# Altium PCB AdaptiveLightingSatellite.PcbDoc
Units mm, origin at the board's own origin, x right, y up, seen from the top; angles counter-clockwise.
Board outline 23.37 x 31.24 mm, 2 copper layers (Top Layer, Bottom Layer); 24 components, 18 nets, 144 pads, 143 vias.
Unrouted connection lines stored in the file: 2.
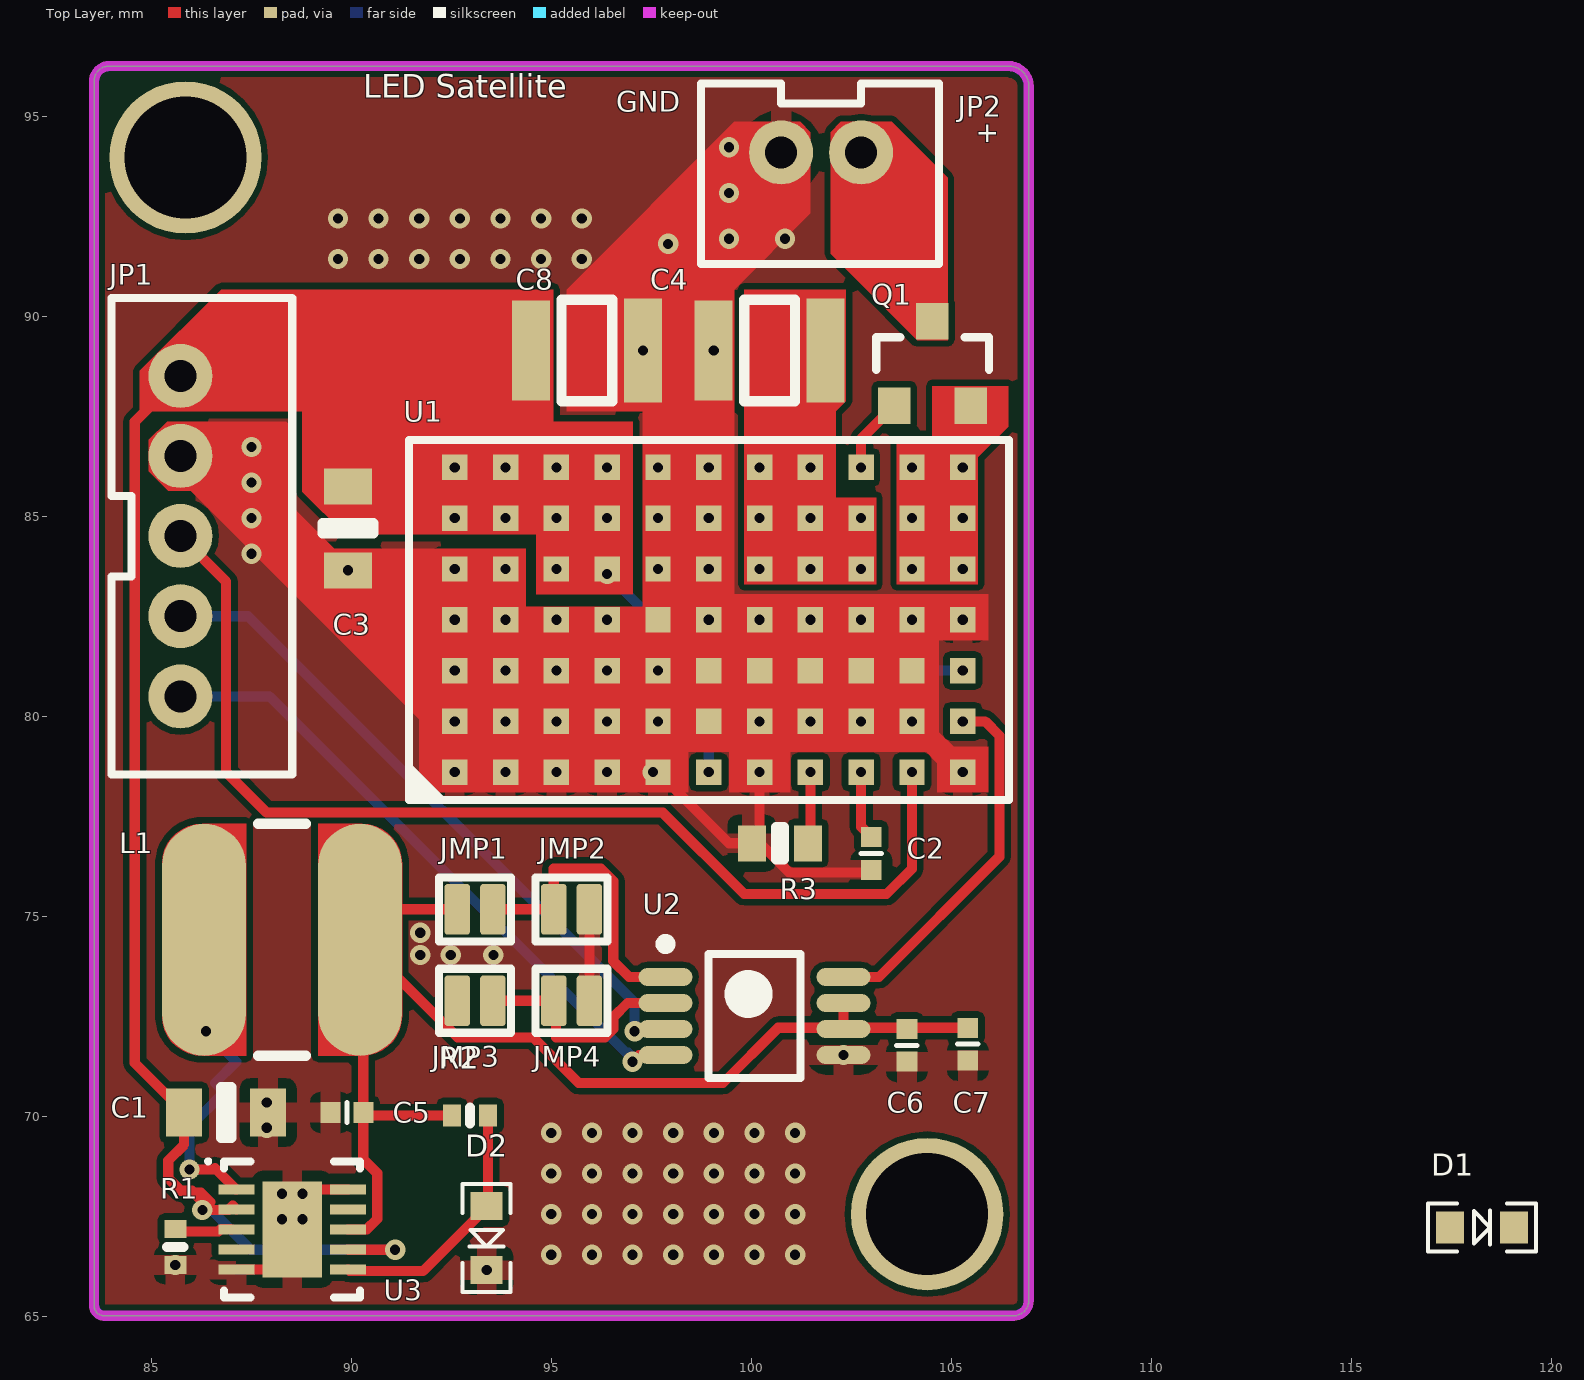
[diagram p0: Top Layer view]
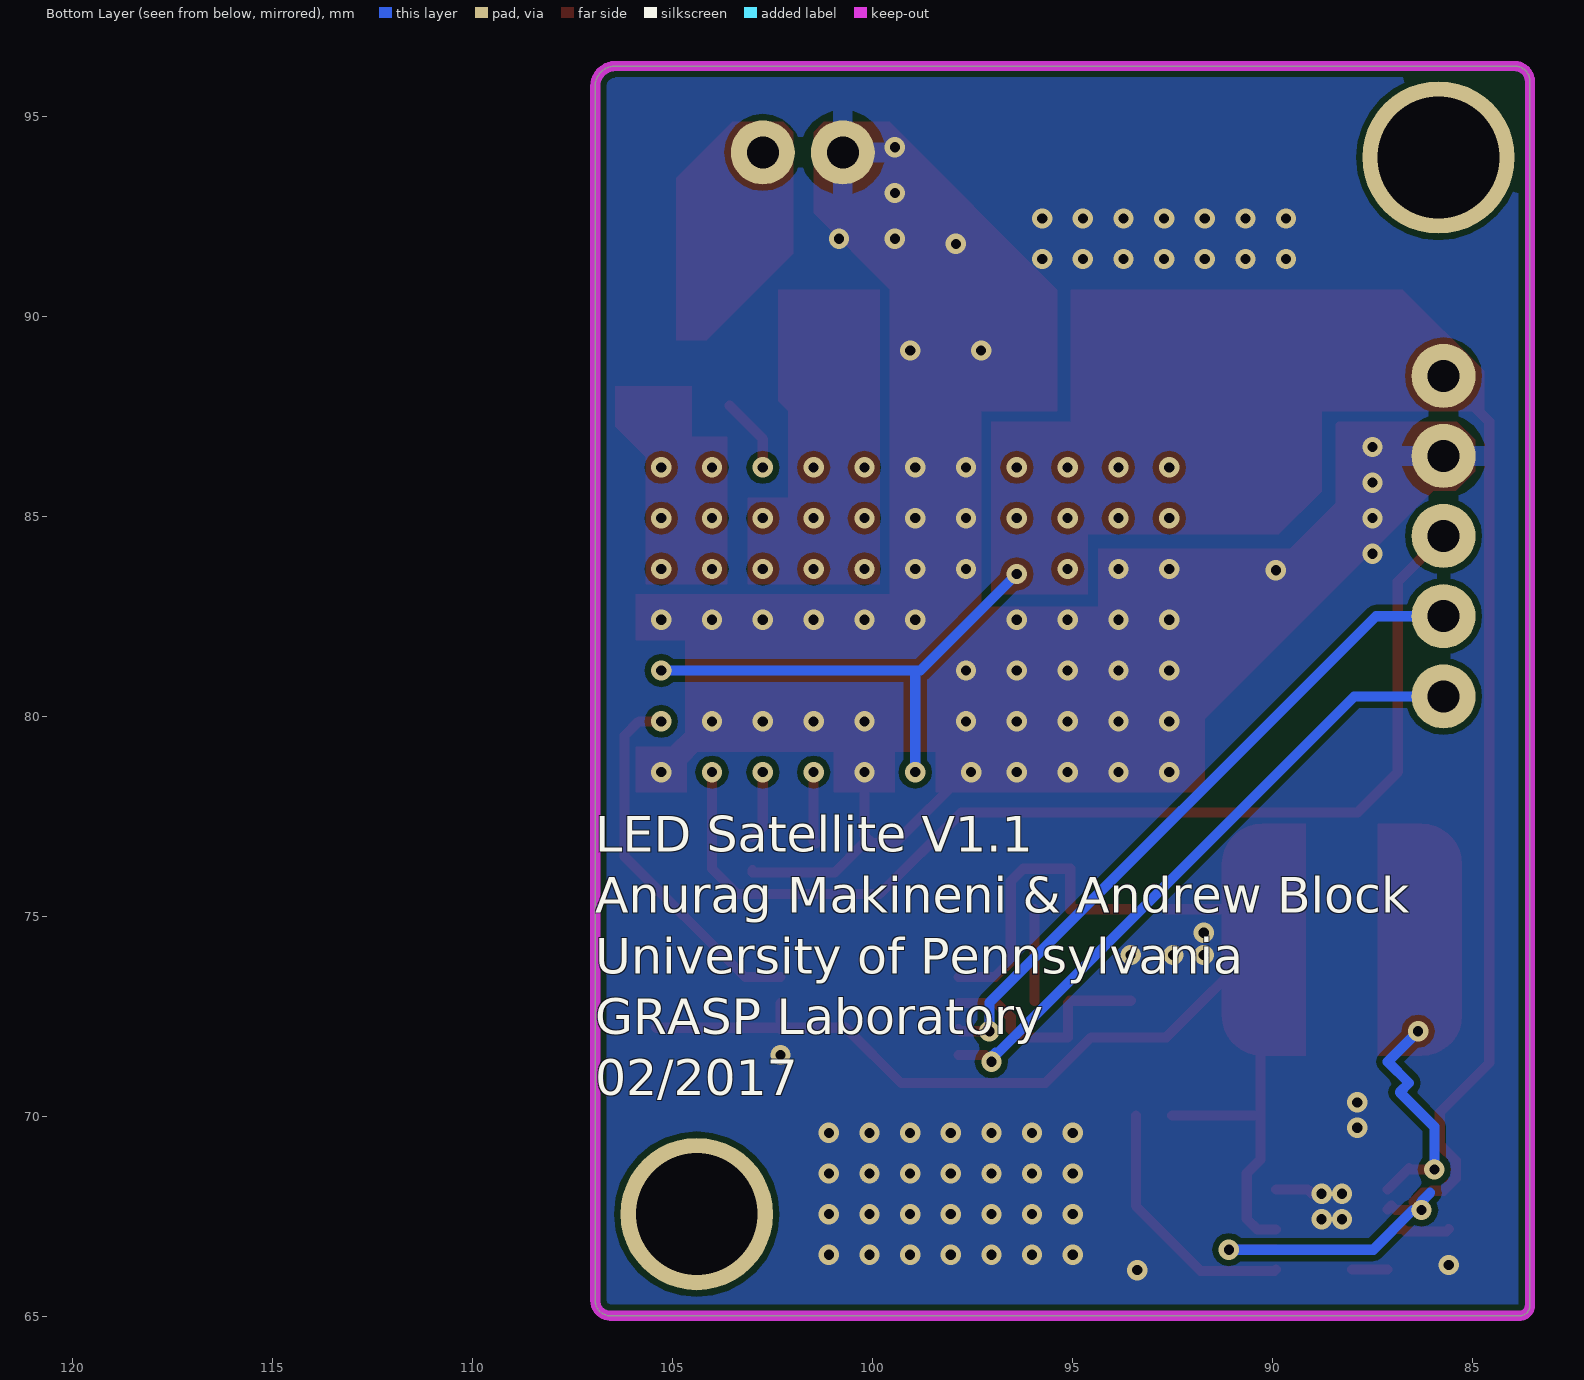
[diagram p1: Bottom Layer view, seen from below]
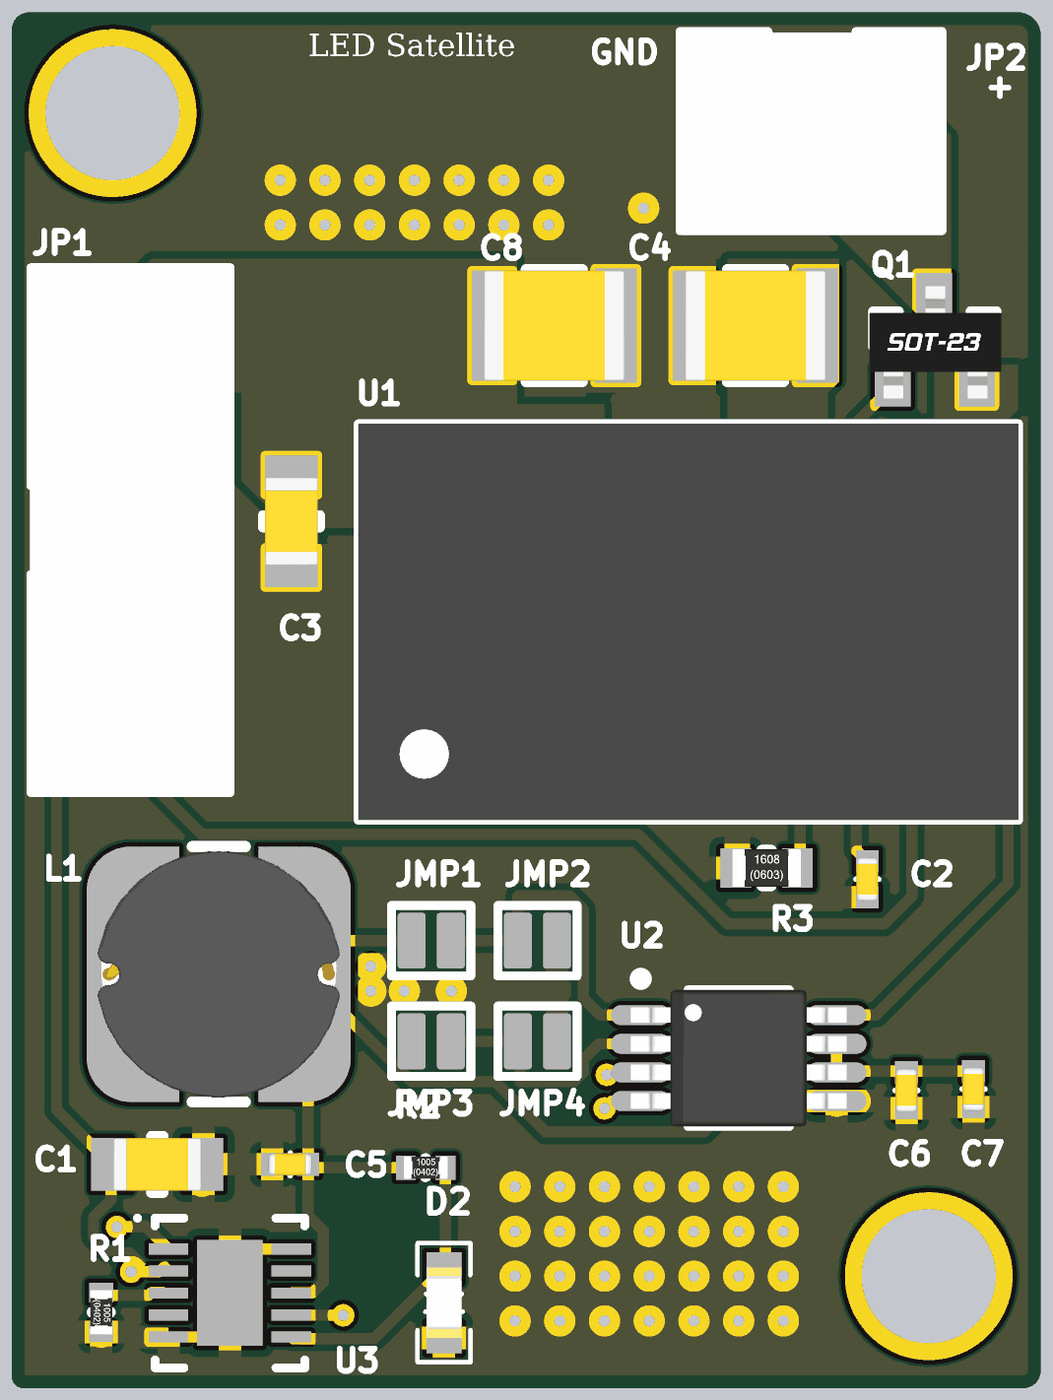
[diagram p2: 3D render of the assembled board from above, using the file's embedded part models]

## Layer stack, top to bottom
Top Solder: solder mask 0.0102, Solder Resist, Dk 3.5
Top Layer: signal copper 0.0356
Dielectric 1: dielectric 0.32, FR-4, Dk 4.8
Bottom Layer: signal copper 0.0356
Bottom Solder: solder mask 0.0102, Solder Resist, Dk 3.5

## Board outline
83.566,65.278 ccw(c83.82,65.278) 83.82,65.024 106.553,65.024 ccw(c106.553,65.405) 106.934,65.405 106.934,95.758 ccw(c106.426,95.758) 106.426,96.266 83.947,96.266 ccw(c83.947,95.885) 83.566,95.885

## Design rules (kind name [scope] priority, off if disabled: settings)
Clearance [All] p1: gap=0.152 ignorepadtopadclearanceinfootprint=FALSE
PolygonConnect PolygonConnect_1 [IsVia] p1: connectstyle=Direct reliefconductorwidth=0.254 reliefentries=4 polygonreliefangle="90 Angle" airgapwidth=0.254
PolygonConnect [All] p2: connectstyle=Relief reliefconductorwidth=0.508 reliefentries=4 polygonreliefangle="90 Angle" airgapwidth=0.254
RoutingVias [All] p1: holewidth=0.254 width=0.508 viastyle="Through Hole" minholewidth=0.254 minwidth=0.508 maxholewidth=0.254 maxwidth=0.508
SolderMaskExpansion SolderMaskExpansion_1 [IsVia] p1: expansion=0.025 soldermaskfromhole=TRUE
SolderMaskExpansion [All] p2: expansion=0.102
Width [All] p1: maxlimit=0.254 minlimit=0.254 preferedwidth=0.254
30 further rules are at their usual default settings.

## Components (designator, comment, footprint, x,y, rotation, side; value= is the part's Value field where it differs from the comment)
C1 "1uF" C0805[2012X120] 86.868,70.104 r180 top
C2 "10nF 100V 0402" C0402[1005X55] 102.997,76.581 r90 top value=10nF
C3 "1uF" C0805[2012X120] 89.916,84.709 r90 top
C4 "10uF 50V X5R +/-20% 1210" C1210[3225X150] 100.457,89.154 r180 top value="10 uF"
C5 "10uF 6.3V 0402" C0402[1005X55] 89.887,70.104 r0 top value=10uF
C6 "0.1uF 6.3V 0402" C0402[1005X55] 103.886,71.784 r270 top value=0.1uF
C7 "4.7uF 6.3V 0402" C0402[1005X55] 105.41,71.813 r90 top value=4.7uF
C8 "4.7uF 100V 1210" C1210[3225X200] 95.885,89.154 r180 top value=4.7uF
D1 "LED_0603_GREEN_5mA" LED0603 118.262,67.234 r0 top
D2 "LED_0603_BLUE_5mA" LED0603 93.381,66.963 r270 top
JMP1 "Solder Jumper" SOLDER-JUMPER 93.091,75.184 r90 top
JMP2 "Solder Jumper" SOLDER-JUMPER 95.504,75.184 r90 top
JMP3 "" SOLDER-JUMPER 93.091,72.898 r90 top
JMP4 "Solder Jumper" SOLDER-JUMPER 95.504,72.898 r90 top
JP1 "JST_PH_5_VERT" JST-PH-5-PTH-VERT 85.725,84.519 r270 top
JP2 "JST_PH_2_VERT" JST-PH-2-PTH-VERT 101.743,94.107 r180 top
L1 "SDR0604-470KL" SDR0604 88.265,74.422 r0 top value=47uH
Q1 "Si2319DS-T1-E3" SOT23-3 104.521,88.773 r0 top
R1 "56K2 1% 0402" R0402[1005] 85.596,66.744 r270 top value=56K2
R2 "10K 1% 0402" R0402[1005] 92.964,70.028 r0 top value=10K
R3 "30.1K 1% 0603" R0603[1608] 100.711,76.835 r0 top value=30.1K
U1 "LTM8042" LGA-77 98.933,82.423 r90 top
U2 "DAC121C085" TSSOP-8 100.076,72.517 r0 top
U3 "LM5165YDRCR" "VSON-10 (3mmx3mm)" 88.519,67.183 r0 top

## Footprints (in the part's own frame and the unit in brackets; to place one, negate y for a bottom-side part, rotate by r counter-clockwise, add the part's x,y. Pads: shape width x height; smd on the part's side, far side on the other; paste and mask are expansions set on the pad)
C0402[1005X55] [mm] "Chip Capacitor, Body 1.0x0.5mm"
  rect 0.5x0.52 smd: 1(-0.41,0) 2(0.41,0)
  silkscreen extent 0,-0.25 0,0.25, body extent -0.5,-0.25 0.5,0.25, height 0.56
C0805[2012X120] [mm] "Chip Capacitor, Body 2.0x1.25mm"
  rect 0.9x1.2 smd: 1(-1.05,0) 2(1.05,0)
  silkscreen extent -0.13,-0.64 0.13,0.64, body extent -1,-0.6 1,0.6, height 1.21
C1210[3225X150] [mm] "Chip Capacitor, Body 3.2x2.5mm"
  rect 0.95x2.6 smd: 1(-1.4,0)
  rect 0.95x2.5 smd: 2(1.4,0)
  silkscreen extent -0.64,-1.27 0.64,1.27, body extent -1.6,-1.25 1.6,1.25, height 1.51
C1210[3225X200] [mm] "Chip Capacitor, Body 3.2x2.5mm"
  rect 0.95x2.6 smd: 1(-1.4,0)
  rect 0.95x2.5 smd: 2(1.4,0)
  silkscreen extent -0.64,-1.27 0.64,1.27, body extent -1.6,-1.25 1.6,1.25, height 1.99
JST-PH-2-PTH-VERT [mm]
  round 1.6 hole 0.8: 1(-1,0) 2(1,0)
  silkscreen extent -2.95,-1.72 3,2.79, body extent -2.95,-1.7 2.95,2.8, height 6
JST-PH-5-PTH-VERT [mil]
  round 63 hole 31.5: 1(-157.48,0) 2(-78.74,0) 3(0,0) 4(79,0) 5(158,0)
  silkscreen extent -234,-68 235,110, body extent -236,-69 232,108, height 236
LED0603 [mm]
  rect 0.7x0.8 smd: A(-0.8,0) C(0.8,0)
  silkscreen extent -1.35,-0.6 1.35,0.6, body extent -0.8,-0.4 0.8,0.4, height 0.75
LGA-77 [mm] "LGA, 77-Leads, Body 9.00x15.00mmx2.82mm, Pitch 1.27mm"
  rect 0.635x0.635 smd: A1(-3.81,6.35) A2(-2.54,6.35) A3(-1.27,6.35) A4(0,6.35) A5(1.27,6.35) A6(2.54,6.35) A7(3.81,6.35) B1(-3.81,5.08) B2(-2.54,5.08) B3(-1.27,5.08) B4(0,5.08) B5(1.27,5.08) B6(2.54,5.08) B7(3.81,5.08) C1(-3.81,3.81) C2(-2.54,3.81) C3(-1.27,3.81) C4(0,3.81) C5(1.27,3.81) C6(2.54,3.81) C7(3.81,3.81) D1(-3.81,2.54) D2(-2.54,2.54) D3(-1.27,2.54) D4(0,2.54) D5(1.27,2.54) D6(2.54,2.54) D7(3.81,2.54) E1(-3.81,1.27) E2(-2.54,1.27) E3(-1.27,1.27) E4(0,1.27) E5(1.27,1.27) E6(2.54,1.27) E7(3.81,1.27) F1(-3.81,0) F2(-2.54,0) F3(-1.27,0) F4(0,0) F5(1.27,0) F6(2.54,0) F7(3.81,0) G1(-3.81,-1.27) G2(-2.54,-1.27) G3(-1.27,-1.27) G4(0,-1.27) G5(1.27,-1.27) G6(2.54,-1.27) G7(3.81,-1.27) H1(-3.81,-2.54) H2(-2.54,-2.54) H3(-1.27,-2.54) H4(0,-2.54) H5(1.27,-2.54) H6(2.54,-2.54) H7(3.81,-2.54) J1(-3.81,-3.81) J2(-2.54,-3.81) J3(-1.27,-3.81) J4(0,-3.81) J5(1.27,-3.81) J6(2.54,-3.81) J7(3.81,-3.81) K1(-3.81,-5.08) K2(-2.54,-5.08) K3(-1.27,-5.08) K4(0,-5.08) K5(1.27,-5.08) K6(2.54,-5.08) K7(3.81,-5.08) L1(-3.81,-6.35) L2(-2.54,-6.35) L3(-1.27,-6.35) L4(0,-6.35) L5(1.27,-6.35) L6(2.54,-6.35) L7(3.81,-6.35)
  silkscreen extent -4.5,-7.5 4.5,7.5, body extent -4.5,-7.5 4.5,7.5, height 2.82
R0402[1005] [mm] "Chip Resistor, Body 1.0x0.5mm"
  rect 0.45x0.55 smd: 1(-0.45,0) 2(0.45,0)
  silkscreen extent 0,-0.2 0,0.2, body extent -0.5,-0.25 0.5,0.25, height 0.35
R0603[1608] [mm] "Chip Resistor, Body 1.55x0.85mm"
  rect 0.7x0.9 smd: 1(-0.7,0) 2(0.7,0)
  silkscreen extent -0.1,-0.4 0.1,0.4, body extent -0.77,-0.42 0.78,0.43, height 0.45
SDR0604 [mm]
  rrect100% 2.1x5.8 smd: 1(-1.95,0) 2(1.95,0)
  Top Layer region: -2,2.9 -0.9,2.9 -0.9,-2.9 -2,-2.9 -2.5,-2.766 -2.866,-2.4 -3,-1.9 -3,-1.9 -3,1.9 -2.866,2.4 -2.5,2.766 -2,2.9
  Top Layer region: 2,2.9 0.9,2.9 0.9,-2.9 2,-2.9 2.5,-2.766 2.866,-2.4 3,-1.9 3,-1.9 3,1.9 2.866,2.4 2.5,2.766 2,2.9
  silkscreen extent -0.6,-2.9 0.6,2.9, body extent -2.75,-2.8 2.75,2.8, height 4.55
SOLDER-JUMPER [mm]
  rrect25% 1.27x0.635 smd mask+0: 1(0,0.445) 2(0,-0.445)
  silkscreen extent -0.8,-0.9 0.8,0.9
SOT23-3 [mil]
  rect 32x36 smd: 1(-37.4,-39.37) 2(0,44) 3(38,-39.37)
  silkscreen extent -55,-4 56,28, body extent -58,-50 60,50, height 39
TSSOP-8 [mm] "TSOP, 8-Leads, Body 3.00x3.00mm, Pitch 0.65mm, IPC Medium Density"
  oval 1.35x0.45 smd: 1(-2.225,0.975) 2(-2.225,0.325) 3(-2.225,-0.325) 4(-2.225,-0.975) 5(2.225,-0.975) 6(2.225,-0.325) 7(2.225,0.325) 8(2.225,0.975)
  silkscreen extent -2.35,-1.55 1.15,1.92, body extent -2.45,-1.55 2.45,1.55, height 1.1
"VSON-10 (3mmx3mm)" [mm] "VSON, 10-Leads, Body 3.00x3.00mm, Pitch 0.50mm, Thermal Pad 2.40x1.49mm, IPC Medium Density"
  rect 0.9x0.25 smd: 1(-1.395,1) 2(-1.395,0.5) 3(-1.395,0) 4(-1.395,-0.5) 5(-1.395,-1) 6(1.395,-1) 7(1.395,-0.5) 8(1.395,0) 9(1.395,0.5) 10(1.395,1)
  rect 1.49x2.4 smd: 11(0,0)
  silkscreen extent -2.15,-1.7 1.7,1.75, body extent -1.55,-1.55 1.55,1.55, height 1

## Part data
C1 C3: library part CAP_1uF_100V_0805_20%, "CAP_1uF 50V 20% 0805 (2012 metric)", Manufacturer=TDK, Package Description="0805 (2012 Metric)", Package Reference=0805, PartNumber=C2012X5R1H105M085AB, Tolerance=20%, Voltage=50V, Mounting Technology="Surface Mount"
C2: library part CAP_10nF_100V_0402_10%, "10nF 100V 10% 0402 (1005 Metric)", Manufacturer=TDK, PartNumber=C1005X7S2A103K050BB, Tolerance=10%, Voltage=100V, Mounting Technology="Surface Mount", PackageDescription="0402 (1005 Metric)", PackageReference=0402
C4: library part CAP_10uF_50V_1210_20%, Manufacturer="Taiyo Yuden", PartNumber=UMK325BJ106MM-T, Tolerance=20%, Voltage=50V, Mounting Technology="Surface Mount", PackageDescription="1210 (3325 Metric)", PackageReference=1210
C5: library part CAP_10uF_6.3V_0402_20%, "10uF 6.3V 20% 0402 (1005 Metric)", Manufacturer=Murata, PartNumber=GRM155R60J106ME44D, Tolerance=20%, Voltage=6.3V, Mounting Technology="Surface Mount", PackageDescription="0402 (1005 Metric)", PackageReference=0402
C6: library part CAP_0.1uF_6.3V_0402_10%, "0.1uF 6.3V 10% 0402 (1005 Metric)", Manufacturer=Murata, PartNumber=GRM155R70J104KA01D, Tolerance=10%, Voltage=6.3V, Mounting Technology="Surface Mount", PackageDescription="0402 (1005 Metric)", PackageReference=0402
C7: library part CAP_4.7uF_6.3V_0402_20%, "4.7uF 6.3V 20% 0402 (1005 Metric)", Manufacturer=Murata, PartNumber=GRM155R60J475ME47D, Tolerance=20%, Voltage=6.3V, Mounting Technology="Surface Mount", PackageDescription="0402 (1005 Metric)", PackageReference=0402
C8: library part CAP_4.7uF_100V_1210_10%, "4.7uF 100V 10% 1210 (3225 Metric)", Manufacturer=Murata, PartNumber=GRJ32DC72A475KE11L, Tolerance=10%, Voltage=100V, Mounting Technology="Surface Mount", PackageDescription="1210 (3225 Metric)", PackageReference=1210
D1: Manufacturer="Lite-On Inc.", PartNumber=LTST-C193TGKT-5A, Mounting Technology="Surface Mount", PackageDescription="0603 (1608 Metric)", PackageReference=0603
D2: Manufacturer="Lite-On Inc.", PartNumber=LTST-C193TBKT-5A, Mounting Technology="Surface Mount", PackageDescription="0603 (1608 Metric)", PackageReference=0603
JMP1 JMP2 JMP3 JMP4: library part SOLDER_JMPR
JP1: Manufacturer="JST Sales America, Inc.", PartNumber=B5B-PH-K-S(LF)(SN), Mounting Technology="Through Hole", PackageReference=JST-PH
JP2: Manufacturer="JST Sales America, Inc.", PartNumber=B2B-PH-K-S(LF)(SN), Mounting Technology="Through Hole", PackageReference=JST-PH
L1: "47uH 10% 0.72A 0604", Current=0.72A, Manufacturer=Bourns, Mounting Technology="Surface Mount", PackageReference=SDR0604, PartNumber=SDR0604-470KL
Q1: "P-Channel MOSFET", Manufacturer=Vishay, PartNumber="Si2319DS-T1-E3 #PBF", Mounting Technology="Surface Mount", PackageReference=SOT23-3
R1: library part RES_56K2_0402_1%, "56K2 0.063W 1% 0402 (1005 Metric)", Manufacturer="KOA Speer", PartNumber=RK73H1ETTP5622F, Power=0.063W, Tolerance=1%, ComponentLink1Description=Datasheet, ComponentLink1URL=http://www.koaspeer.com/catimages/Products/RK73H/RK73H.pdf, Mounting Technology="Surface Mount", PackageDescription="0402 (1005 Metric)", PackageReference=0402
R2: library part RES_10K_0402_1%, "10K 0.063W 1% 0402 (1005 Metric)", Manufacturer="KOA Speer", PartNumber=RK73H1ETTP1002F, Power=0.063W, Tolerance=1%, ComponentLink1Description=Datasheet, ComponentLink1URL=http://www.koaspeer.com/catimages/Products/RK73H/RK73H.pdf, Mounting Technology="Surface Mount", PackageDescription="0402 (1005 Metric)", PackageReference=0402
R3: library part RES_30.1K_0603_1%, "30.1K 0.06W 1% 0603 (1005 Metric)", Manufacturer="NIC Corporation", PartNumber=NRC06F3012TRF, Power=0.06, Tolerance=1%, ComponentLink1Description=Datasheet, ComponentLink1URL=https://www.arrow.com/en/products/nrc06f3012trf/nic-components, Mounting Technology="Surface Mount", PackageDescription="0603 (1608 Metric)", PackageReference=0603
U1: Manufacturer="Linear Technology", PartNumber=LTM8042EV#PBF, Mounting Technology="Surface Mount", PackageReference=LGA
U2: "12 Bit Digital to Analog Converter", Manufacturer="Texas Instruments", Mounting Technology="Surface Mount", PackageReference=VSSOP-8, PartNumber=DAC121C085
U3: "LM5165 3-V to 65-V Input, 150-mA Synchronous Buck Converter", Manufacturer="Texas Instruments", Mounting Technology="Surface Mount", PackageReference=VSON-10, PartNumber=LM5165YDRCR

## Free pads (board coordinates)
  round 3.81 hole 3.048: 2(104.394,67.564) 3(85.852,93.98)

## Via types
v1: diameter 0.508, hole 0.254, Top Layer to Bottom Layer, 143 vias

## Nets (pads, with @x,y where several pads share a name; then routed paths per layer and width w, separated by ;. In a path a pad name is that pad's centre, name@x,y a point inside that pad or via, vN(x,y) a via of type N, cw(c..) or ccw(c..) an arc to the next point about the centre after c; other vN are vias at no path point)
3V3: C5.2 C6.1 C7.2 JMP1.1 JMP3.1 L1.2 R2.1 U2.6 U2.7 U3.8 | length 30.8
  Top Layer w0.254: U3.8 90.384,67.183 90.643,67.442 90.643,68.587 90.297,68.934 C5.2 ; R2.1 90.373,70.028 C5.2 ; JMP1.1 90.977,75.184 L1.2 L1.2@90.297,74.34 ; U2.6 U2.6@102.301,72.223 ; U2.7 U2.6@102.301,72.223 ; C7.2 U2.6@102.301,72.223 ; C5.2 L1.2@90.297,74.34 ; L1.2@90.297,74.34 92.653,71.984 94.54,71.984 95.683,70.841 99.289,70.841 100.671,72.223 U2.6@102.301,72.223
BATT+: C1.2 C3.2 C8.2 JP1.1 U1.A6 U1.A7 U1.B6 U1.B7 U1.C5 U1.C6 U1.C7 U1.D5 U1.D6 U1.D7 U1.F1 U1.L3 U3.2 U3.7 | length 43.5
  Top Layer w0.254: JP1.1 84.582,87.376 84.582,71.34 C1.2 85.818,69.3 85.42,68.903 85.42,68.461 85.733,68.148 86.009,68.148 86.06,68.097 ; U3.2 87.032,67.775 86.923,67.666 v1(86.274,67.666) ; U3.7 89.922,66.675 v1(91.092,66.675) ; 86.06,68.097 86.239,68.097 86.472,67.864 v1(86.274,67.666) ; 86.06,68.097 86.274,67.884 v1(86.274,67.666)
  Bottom Layer w0.254: 86.06,68.097 86.274,67.884 v1(86.274,67.666) 86.492,67.666 87.482,66.675 v1(91.092,66.675) ; v1(96.393,83.566) 98.806,81.153 v1(105.283,81.153) ; v1(98.933,78.613) 98.933,81.026
  other v1: 95.123,83.693 92.583,84.963 93.853,84.963 95.123,84.963 96.393,84.963 92.583,86.233 93.853,86.233 95.123,86.233 96.393,86.233
CTL: U1.L2 U2.8 | length 9.2
  Top Layer w0.254: U2.8 103.19,73.492 106.197,76.499 106.197,79.527 105.842,79.883 v1(105.283,79.883)
ENABLE: D1.A JP1.3 U1.K1 | length 27.5
  Top Layer w0.254: JP1.3 86.868,83.376 86.868,78.613 87.88,77.601 97.786,77.601 99.822,75.565 103.378,75.565 104.013,76.2 v1(104.013,78.613)
GND: C1.1 C2.1 C3.1 C4.2 C5.1 C6.2 C7.1 C8.1 D1.C D2.C JMP2.2 JMP4.2 JP1.2 JP2.2 R1.2 R3.1 U1.A1 U1.A2 U1.A3 U1.A4 U1.A5 U1.B1 U1.B2 U1.B3 U1.B4 U1.B5 U1.C1 U1.C2 U1.C3 U1.C4 U1.D1 U1.D2 U1.D3 U1.D4 U1.E1 U1.E2 U1.E3 U1.E4 U1.E5 U1.E6 U1.E7 U1.F2 U1.F3 U1.F4 U1.F5 U1.F6 U1.F7 U1.G1 U1.G2 U1.G3 U1.G4 U1.H2 U1.H3 U1.H4 U1.J2 U1.J3 U1.J4 U1.K2 U1.K3 U1.K4 U1.L1 U1.L4 U2.5 U3.5 U3.10 U3.11 | length 12.4
  Top Layer w0.254: U3.5 U3.11@88.011,66.183 ; U3.11@89.027,68.087 89.123,68.183 U3.10 ; JMP4.2 JMP2.2 ; U1.E1 99.441,76.835 R3.1 ; v1(100.203,78.613) 100.203,77.027 R3.1 ; C2.1 102.997,76.106 100.945,76.106 100.216,76.835 R3.1
  other v1: 93.381,66.163 85.596,66.294 94.996,66.548 96.012,66.548 97.028,66.548 98.044,66.548 99.06,66.548 100.076,66.548 101.092,66.548 88.265,67.437 88.773,67.437 94.996,67.564 96.012,67.564 97.028,67.564 98.044,67.564 99.06,67.564 100.076,67.564 101.092,67.564 88.265,68.072 88.773,68.072 94.996,68.58 96.012,68.58 97.028,68.58 98.044,68.58 99.06,68.58 100.076,68.58 101.092,68.58 94.996,69.596 96.012,69.596 97.028,69.596 98.044,69.596 99.06,69.596 100.076,69.596 101.092,69.596 87.884,69.723 87.884,70.358 102.301,71.542 91.719,74.041 92.481,74.041 93.548,74.041 91.719,74.6 92.583,78.613 93.853,78.613 95.123,78.613 96.393,78.613 97.536,78.613 105.283,78.613 92.583,79.883 93.853,79.883 95.123,79.883 96.393,79.883 97.663,79.883 100.203,79.883 101.473,79.883 102.743,79.883 104.013,79.883 92.583,81.153 93.853,81.153 95.123,81.153 96.393,81.153 97.663,81.153 92.583,82.423 93.853,82.423 95.123,82.423 96.393,82.423 98.933,82.423 100.203,82.423 101.473,82.423 102.743,82.423 104.013,82.423 105.283,82.423 89.916,83.659 92.583,83.693 93.853,83.693 97.663,83.693 98.933,83.693 87.503,84.074 87.503,84.963 97.663,84.963 98.933,84.963 87.503,85.852 97.663,86.233 98.933,86.233 87.503,86.741 97.285,89.154 99.057,89.154 89.662,91.44 90.678,91.44 91.694,91.44 92.71,91.44 93.726,91.44 94.742,91.44 95.758,91.44 97.917,91.821 99.441,91.948 100.838,91.948 89.662,92.456 90.678,92.456 91.694,92.456 92.71,92.456 93.726,92.456 94.742,92.456 95.758,92.456 99.441,93.091 99.441,94.234
LED+: JP2.1 Q1.2
NetC2_2: C2.2 U1.J1 | length 1.7
  Top Layer w0.254: v1(102.743,78.613) 102.743,77.245 C2.2
NetC4_1: C4.1 U1.G5 U1.G6 U1.G7 U1.H5 U1.H6 U1.H7 U1.J5 U1.J6
  other v1: 100.203,83.693 101.473,83.693 102.743,83.693 100.203,84.963 101.473,84.963 102.743,84.963 100.203,86.233 101.473,86.233
NetD2_A: D2.A R2.2 U3.6 | length 6.5
  Top Layer w0.254: U3.6 89.955,66.142 91.793,66.142 93.414,67.763 R2.2
NetJMP1_2: JMP1.2 JMP2.1 U2.1 | length 7.6
  Top Layer w0.254: JMP1.2 JMP2.1 95.059,76.2 96.234,76.2 96.546,75.888 96.546,73.888 96.942,73.492 U2.1
NetJMP3_2: JMP3.2 JMP4.1 U2.2 | length 5.7
  Top Layer w0.254: JMP3.2 JMP4.1 95.115,72.842 95.115,71.984 96.336,71.984 96.546,72.194 96.546,72.485 96.903,72.842 U2.2
NetL1_1: L1.1 U3.1 | length 5.8
  Top Layer w0.254: v1(85.954,68.682) 86.556,68.682 86.589,68.714 87.122,68.181 U3.1
  Bottom Layer w0.254: v1(85.954,68.682) 85.954,69.748 86.817,70.612 86.589,70.841 87.122,71.374 v1(86.36,72.136)
NetQ1_1: Q1.1 U1.J7 | length 1.9
  Top Layer w0.254: v1(102.743,86.233) 102.743,86.945 Q1.1
NetQ1_3: Q1.3 U1.K5 U1.K6 U1.K7 U1.L5 U1.L6 U1.L7
  other v1: 104.013,83.693 105.283,83.693 104.013,84.963 105.283,84.963 104.013,86.233 105.283,86.233
NetR1_1: R1.1 U3.3 | length 1.5
  Top Layer w0.254: R1.1 85.658,67.132 86.674,67.132 86.736,67.194 86.986,67.194 U3.3@86.997,67.183
NetR3_2: R3.2 U1.H1 | length 1.8
  Top Layer w0.254: R3.2 101.473,76.897 v1(101.473,78.613)
SCL: JP1.4 U2.3 | length 16.9
  Top Layer w0.254: v1(97.079,72.136) 97.795,72.136 U2.3
  Bottom Layer w0.254: JP1.4 87.414,82.512 97.079,72.847 v1(97.079,72.136)
SDA: JP1.5 U2.4 | length 16.1
  Top Layer w0.254: v1(97.028,71.374) 97.196,71.542 U2.4
  Bottom Layer w0.254: JP1.5 87.955,80.506 96.858,71.603 96.926,71.603 97.028,71.501 v1(97.028,71.374)
pads on no net: U3.4 U3.9

## Polygon pours and split planes (outlines as drawn)
GND on Bottom Layer "Keep-Out Layer-No Net" (solid, remove dead copper, pour order 2): 81.534,97.663 109.347,97.663 109.601,97.917 109.855,97.663 109.855,62.865 81.153,62.865 80.391,63.627
GND on Top Layer "Keep-Out Layer-No Net" (solid, remove dead copper, pour order 0): 81.661,97.409 109.474,97.409 109.728,97.663 109.982,97.409 109.982,62.611 81.28,62.611 80.518,63.373

## Keep-outs
Keep-Out Layer:
  the board outline again, w0.254

## Other copper
Top Layer:
  region net BATT+: 94.615,84.557 94.615,83.058 97.028,83.058 97.028,87.376 95.047,87.376 95.047,90.678 86.741,90.678 84.709,88.646 84.709,87.63 88.773,87.63 88.773,85.623 89.84,84.557
  region net GND: 95.377,87.63 95.377,90.678 99.568,90.678 99.568,83.058 105.918,83.058 105.918,81.915 104.686,81.915 104.686,79.616 105.054,79.248 105.918,79.248 105.918,78.105 104.648,78.105 104.648,78.842 104.369,79.121 100.965,79.121 100.965,78.105 99.441,78.105 99.441,79.121 98.425,79.121 98.425,78.105 91.694,78.105 91.694,80.62 89.256,83.058 89.256,84.201 91.059,84.201 94.361,84.201 94.361,82.753 97.282,82.753 97.282,87.63
  region net GND: 84.938,86.131 84.938,86.919 85.395,87.376 88.367,87.376 88.417,87.325 88.417,85.344 91.694,82.067 91.694,79.934 85.979,85.649 85.42,85.649
  region net NetC4_1: 99.822,83.312 103.124,83.312 103.124,85.471 102.108,85.471 102.108,87.63 102.362,87.884 102.362,90.678 99.822,90.678
  region net NetQ1_3: 103.632,83.312 105.664,83.312 105.664,86.487 106.426,87.249 106.426,88.265 104.521,88.265 104.521,86.995 103.632,86.995
  region net GND: 99.568,90.678 101.473,92.583 101.473,94.615 101.219,94.869 99.568,94.869 95.377,90.678
  region net LED+: 102.235,94.869 103.505,94.869 104.902,93.472 104.902,89.408 104.14,89.408 101.981,91.567 101.981,94.615

## Silkscreen, mask and mechanical layers (free items; w line width, h text height)
Top Overlay:
  text "LED Satellite" at 90.297,95.275 h1
  text "GND" at 96.622,95.123 h0.51
  text "+" at 105.613,94.361 h0.51
Bottom Overlay:
  text "LED Satellite V1.1 / Anurag Makineni & Andrew Block / University of Pennsylvania / GRASP Laboratory / 02/2017" at 106.934,70.231 h1.52